# Altium PCB WS7.820.291.V04.PcbDoc (part 3 of 3)
Units mil, origin at the board's own origin, x right, y up, seen from the top; angles counter-clockwise.
Board outline 9222.63 x 1665.56 mil, 4 copper layers (Top Layer, S2, S3, Bottom Layer); 240 components, 148 nets, 713 pads, 1711 vias.
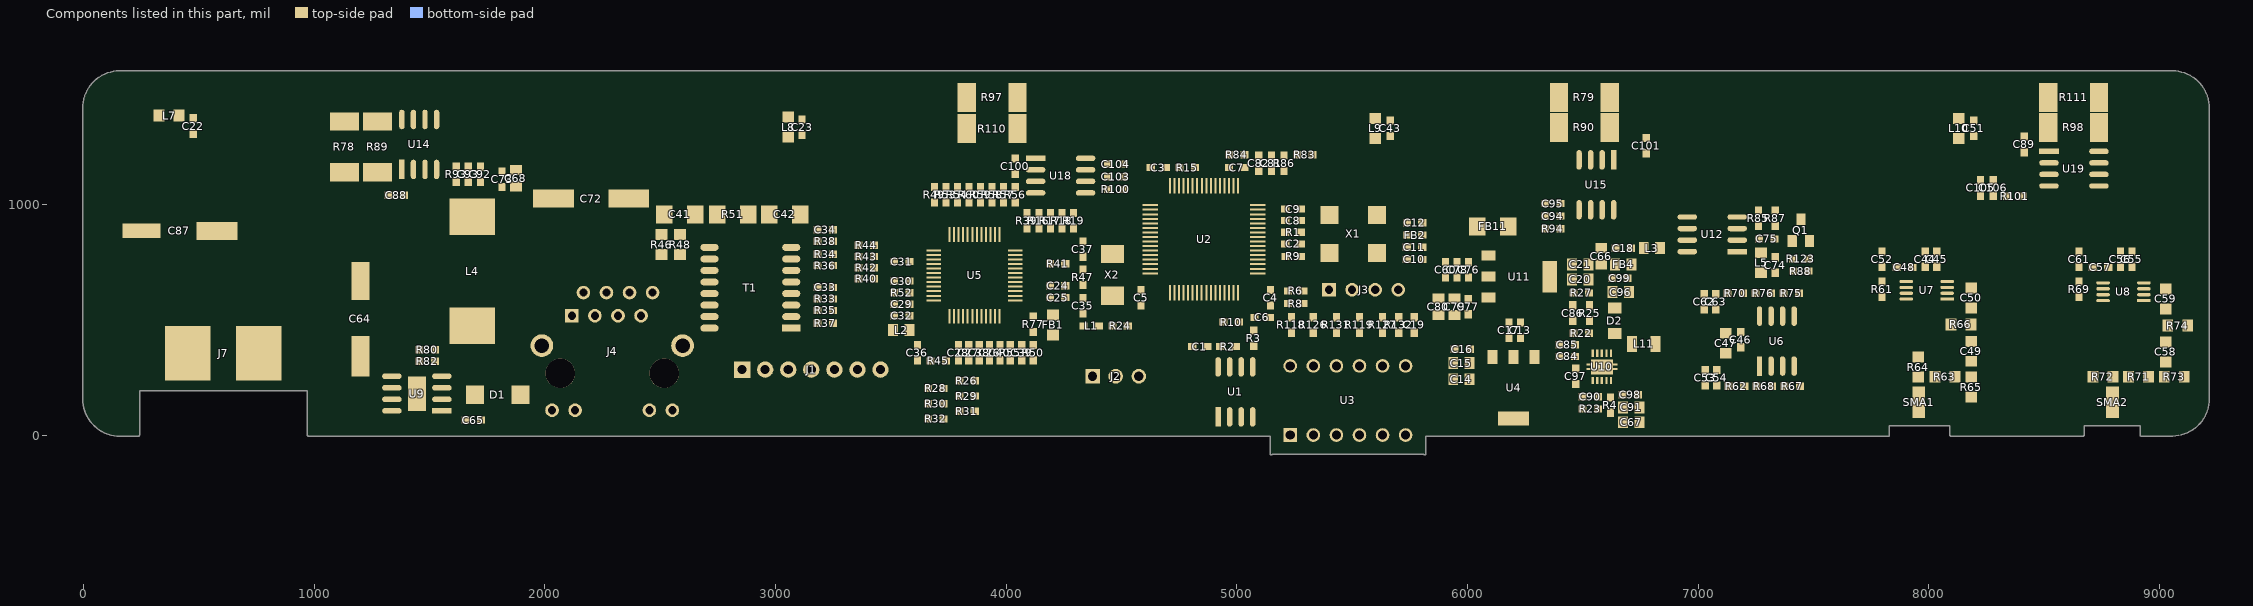
[diagram p5: the components of this part, seen from the top]

## Silkscreen, mask and mechanical layers (free items; w line width, h text height) (continued)
Top Solder:
  rectangle: 8670,61 8740.33,215
  rectangle: 8250,135 8307,670
  rectangle: 8688.76,1282.72 8938,1529.72
  rectangle: 8395,1276.23 8472,1541.76
  rectangle: 6580,1272 6820,1537
  rectangle: 6174,1295 6440,1541.28
  rectangle: 4080,1270 4210,1536
  rectangle: 3606,1295 3870,1542
  rectangle: 350,230 630,480
  region: 745,1155 860,1270 805,1325 690,1210
  rectangle: 690,520 835,1210
  rectangle: 2994,1361 3144,1542
  rectangle: 350,450 820,590
  rectangle: 730,230 1010,1530
  rectangle: 8407.81,0 8570.81,959.67
  region: 8967.48,555 8905,555 8905,313 8967.48,313
  region: 8670,370 8670,313 8965.61,313 8965.61,370
  region: 8761.33,312.85 8761.33,354 8699.18,354 8699.18,312.85
  region: 8144.85,140 8144.85,192.83 8020.85,192.83 8020.85,140
  rectangle: 8020.85,60 8075,192.53
  rectangle: 8165.18,387.58 8204.55,566.73
  rectangle: 8166.63,241.73 8206,335.17
  rectangle: 8104.57,232.99 8209,272.36
  rectangle: 7940.63,232.87 8050,272.24
  rectangle: 7941.14,182 7980.51,267.73
  rectangle: 8777.14,182.27 8816.51,268
  rectangle: 8776.63,233.14 8886,272.51
  rectangle: 8940.58,233.26 9045,272.63
  rectangle: 9006.63,242 9046,335.43
  rectangle: 9008.19,387.84 9047.56,567
  rectangle: 7559,0 7721,959.72
  rectangle: 390,1360 540,1541
  rectangle: 1059,1310 1360,1542
  region: 9212.6,959.71 7559,959.71 7559,869.8 9212.6,869.8
  rectangle: 5058,611 5162.8,648
  rectangle: 5125.75,487 5199,565
  rectangle: 8080.38,1361 8230.38,1542
  rectangle: 5553.06,1361 5703.06,1542
  rectangle: 625,230 730,480
  region: 8904.67,641.14 8904.67,627.14 8979.67,627.14 9006.67,614.14 9051.09,614.14 9051.09,653.51 9006.67,653.51 8978.67,641.14
  region: 8064.48,647.4 8064.48,633.4 8139.48,633.4 8166.48,620.4 8210.9,620.4 8210.9,659.77 8166.48,659.77 8138.48,647.4
Bottom Solder:
  rectangle: 7559,-5 9245,538.82
  rectangle: 1115,10 1915,965.91
  rectangle: 1387.27,83.54 1502.27,276.46
  region: 6523.94,355 6523.94,236.94 6643,236.94 6643,355
  region: 6523.94,355.06 6523.94,236.94 6642.06,236.94 6642.06,355.06

## Text inside footprints (layer, text, board x,y; h text height)
D1: Top Overlay "+" at 1967,142 h60 r180
D2: Top Overlay "+" at 6671,594 h47.24 r270